# Altium PCB qol56-pcb(1).PcbDoc (part 1 of 2)
Units mm, origin at the board's own origin, x right, y up, seen from the top; angles counter-clockwise.
Board outline 272 x 86 mm, 2 copper layers (F.Cu, B.Cu); 180 components, 134 nets, 1209 pads, 192 vias.
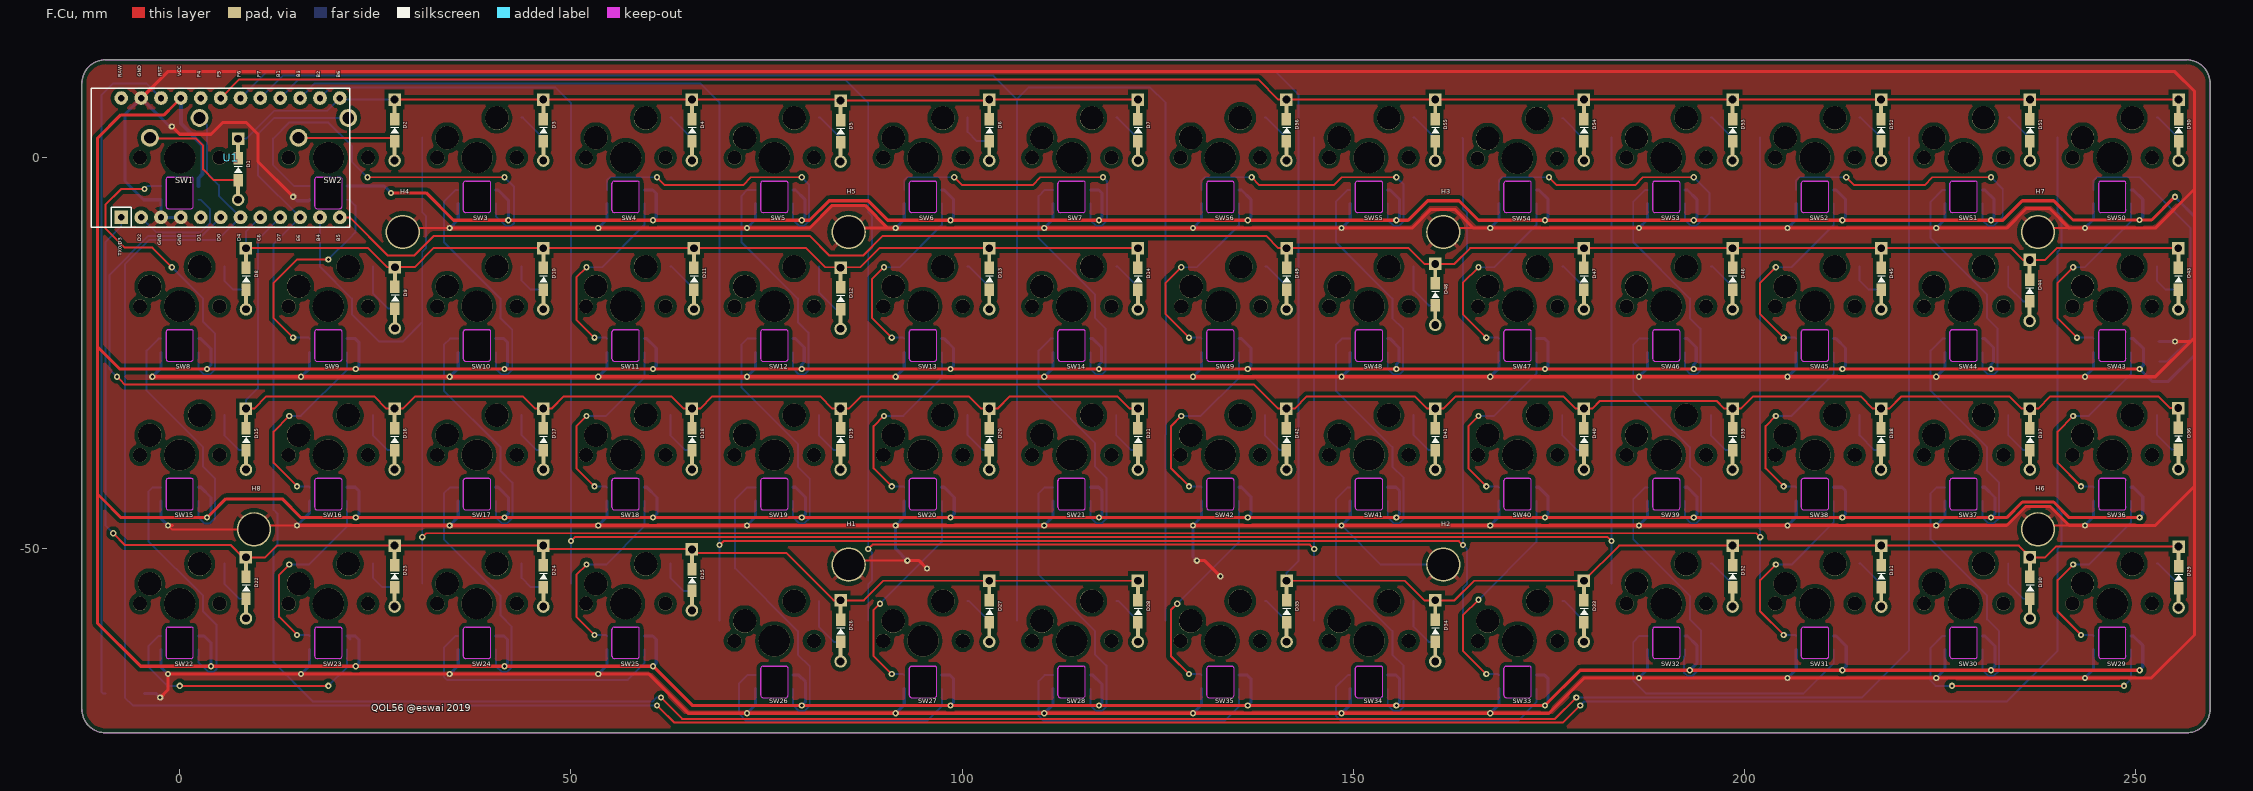
[diagram p0: F.Cu view]
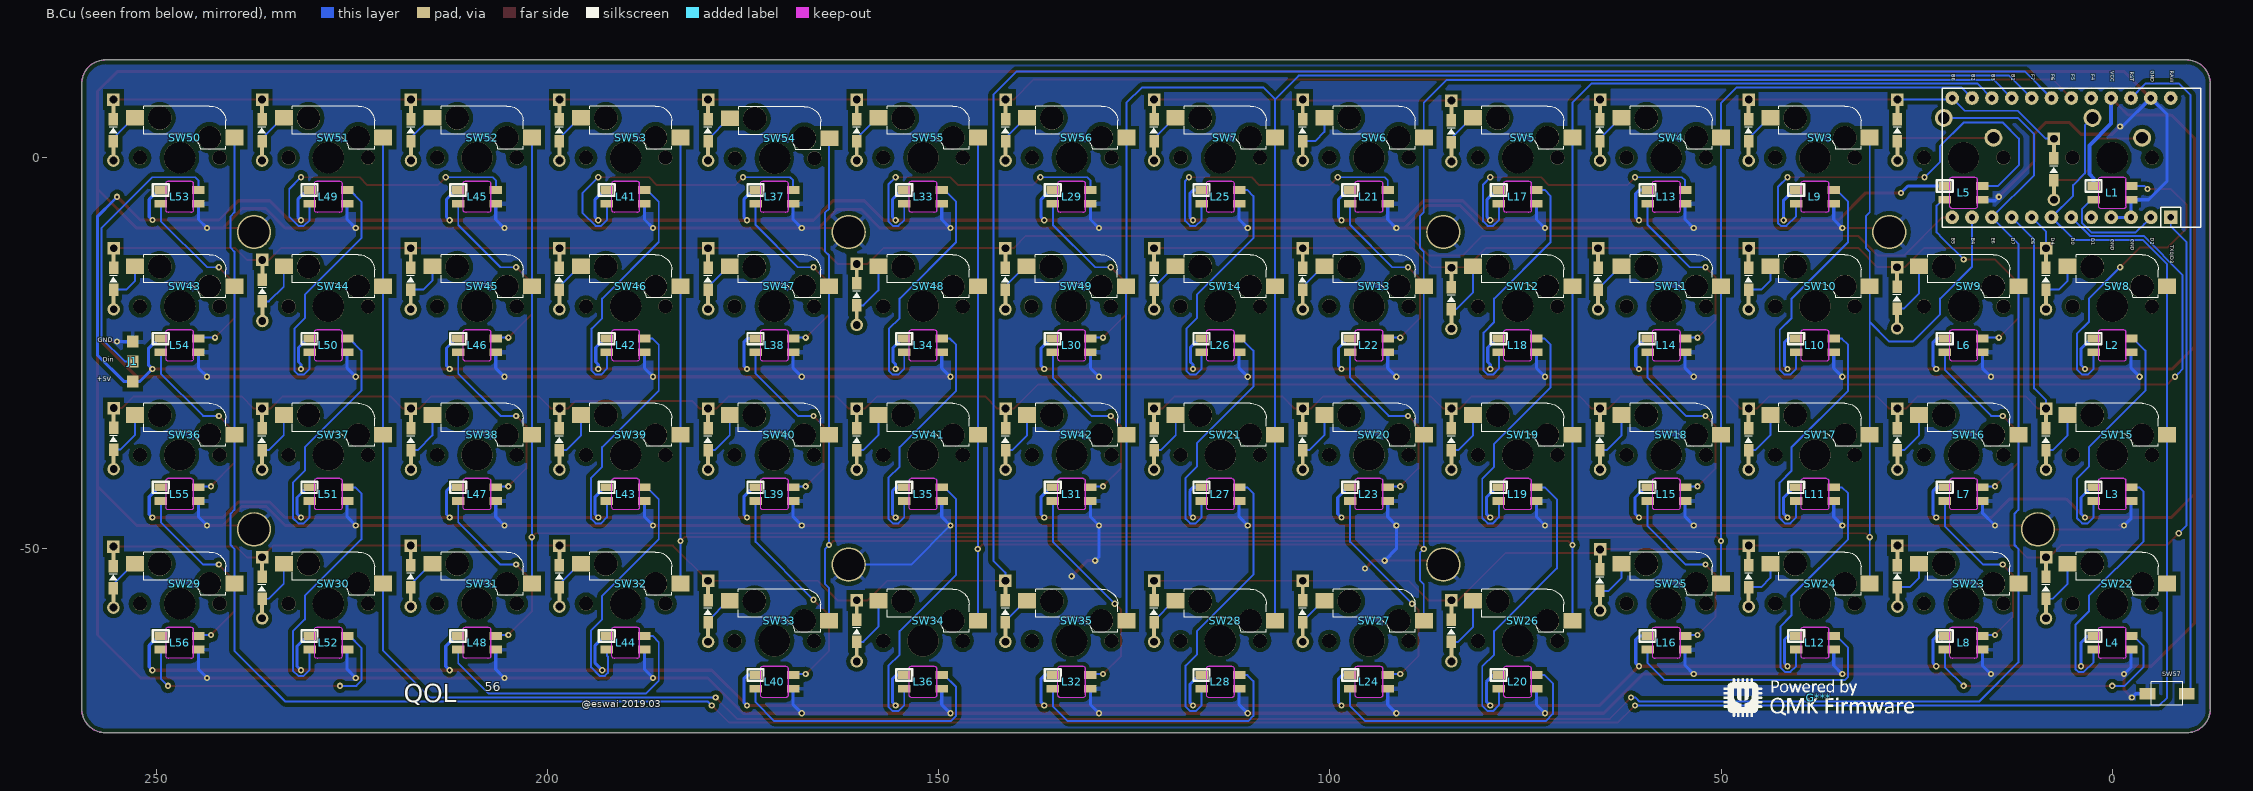
[diagram p1: B.Cu view, seen from below]

## Layer stack, top to bottom
F.Mask: solder mask 0.0102, Solder Resist, Dk 3.5
F.Cu: signal copper 0.0356
Dielectric 1: dielectric 0.32, FR-4, Dk 4.8
B.Cu: signal copper 0.0356
B.Mask: solder mask 0.0102, Solder Resist, Dk 3.5

## Board outline
259.5,-70.5 cw(c256.5,-70.5) 256.5,-73.5 -9.5,-73.5 cw(c-9.5,-70.5) -12.5,-70.5 -12.5,9.5 cw(c-9.5,9.5) -9.5,12.5 256.5,12.5 cw(c256.5,9.5) 259.5,9.5 259.5,-70.5
cut-out: -1.75,-2.75 -1.75,-6.2 -1.756,-6.2 -1.733,-6.317 -1.666,-6.416 -1.567,-6.483 -1.45,-6.506 -1.45,-6.5 1.45,-6.5 1.45,-6.506 1.567,-6.483 1.666,-6.416 1.733,-6.317 1.756,-6.2 1.75,-6.2 1.75,-2.75 1.755,-2.75 1.735,-2.652 1.68,-2.57 1.598,-2.515 1.5,-2.495 1.5,-2.5 -1.45,-2.5 -1.45,-2.494 -1.567,-2.517 -1.666,-2.584 -1.733,-2.683 -1.747,-2.758 -1.75,-2.75
cut-out: 245.25,-60.25 245.25,-63.7 245.244,-63.7 245.267,-63.817 245.334,-63.916 245.433,-63.983 245.55,-64.006 245.55,-64 248.45,-64 248.45,-64.006 248.567,-63.983 248.666,-63.916 248.733,-63.817 248.756,-63.7 248.75,-63.7 248.75,-60.25 248.755,-60.25 248.735,-60.152 248.68,-60.07 248.598,-60.015 248.5,-59.995 248.5,-60 245.55,-60 245.55,-59.994 245.433,-60.017 245.334,-60.084 245.267,-60.183 245.253,-60.258
cut-out: 245.25,-41.25 245.25,-44.7 245.244,-44.7 245.267,-44.817 245.334,-44.916 245.433,-44.983 245.55,-45.006 245.55,-45 248.45,-45 248.45,-45.006 248.567,-44.983 248.666,-44.916 248.733,-44.817 248.756,-44.7 248.75,-44.7 248.75,-41.25 248.755,-41.25 248.735,-41.152 248.68,-41.07 248.598,-41.015 248.5,-40.995 248.5,-41 245.55,-41 245.55,-40.994 245.433,-41.017 245.334,-41.084 245.267,-41.183 245.253,-41.258
cut-out: 245.25,-22.25 245.25,-25.7 245.244,-25.7 245.267,-25.817 245.334,-25.916 245.433,-25.983 245.55,-26.006 245.55,-26 248.45,-26 248.45,-26.006 248.567,-25.983 248.666,-25.916 248.733,-25.817 248.756,-25.7 248.75,-25.7 248.75,-22.25 248.755,-22.25 248.735,-22.152 248.68,-22.07 248.598,-22.015 248.5,-21.995 248.5,-22 245.55,-22 245.55,-21.994 245.433,-22.017 245.334,-22.084 245.267,-22.183 245.253,-22.258
cut-out: 245.25,-3.25 245.25,-6.7 245.244,-6.7 245.267,-6.817 245.334,-6.916 245.433,-6.983 245.55,-7.006 245.55,-7 248.45,-7 248.45,-7.006 248.567,-6.983 248.666,-6.916 248.733,-6.817 248.756,-6.7 248.75,-6.7 248.75,-3.25 248.755,-3.25 248.735,-3.152 248.68,-3.07 248.598,-3.015 248.5,-2.995 248.5,-3 245.55,-3 245.55,-2.994 245.433,-3.017 245.334,-3.084 245.267,-3.183 245.253,-3.258
cut-out: 226.25,-60.25 226.25,-63.7 226.244,-63.7 226.267,-63.817 226.334,-63.916 226.433,-63.983 226.55,-64.006 226.55,-64 229.45,-64 229.45,-64.006 229.567,-63.983 229.666,-63.916 229.733,-63.817 229.756,-63.7 229.75,-63.7 229.75,-60.25 229.755,-60.25 229.735,-60.152 229.68,-60.07 229.598,-60.015 229.5,-59.995 229.5,-60 226.55,-60 226.55,-59.994 226.433,-60.017 226.334,-60.084 226.267,-60.183 226.253,-60.258
cut-out: 226.25,-41.25 226.25,-44.7 226.244,-44.7 226.267,-44.817 226.334,-44.916 226.433,-44.983 226.55,-45.006 226.55,-45 229.45,-45 229.45,-45.006 229.567,-44.983 229.666,-44.916 229.733,-44.817 229.756,-44.7 229.75,-44.7 229.75,-41.25 229.755,-41.25 229.735,-41.152 229.68,-41.07 229.598,-41.015 229.5,-40.995 229.5,-41 226.55,-41 226.55,-40.994 226.433,-41.017 226.334,-41.084 226.267,-41.183 226.253,-41.258
cut-out: 226.25,-22.25 226.25,-25.7 226.244,-25.7 226.267,-25.817 226.334,-25.916 226.433,-25.983 226.55,-26.006 226.55,-26 229.45,-26 229.45,-26.006 229.567,-25.983 229.666,-25.916 229.733,-25.817 229.756,-25.7 229.75,-25.7 229.75,-22.25 229.755,-22.25 229.735,-22.152 229.68,-22.07 229.598,-22.015 229.5,-21.995 229.5,-22 226.55,-22 226.55,-21.994 226.433,-22.017 226.334,-22.084 226.267,-22.183 226.253,-22.258
cut-out: 226.25,-3.25 226.25,-6.7 226.244,-6.7 226.267,-6.817 226.334,-6.916 226.433,-6.983 226.55,-7.006 226.55,-7 229.45,-7 229.45,-7.006 229.567,-6.983 229.666,-6.916 229.733,-6.817 229.756,-6.7 229.75,-6.7 229.75,-3.25 229.755,-3.25 229.735,-3.152 229.68,-3.07 229.598,-3.015 229.5,-2.995 229.5,-3 226.55,-3 226.55,-2.994 226.433,-3.017 226.334,-3.084 226.267,-3.183 226.253,-3.258
cut-out: 207.25,-60.25 207.25,-63.7 207.244,-63.7 207.267,-63.817 207.334,-63.916 207.433,-63.983 207.55,-64.006 207.55,-64 210.45,-64 210.45,-64.006 210.567,-63.983 210.666,-63.916 210.733,-63.817 210.756,-63.7 210.75,-63.7 210.75,-60.25 210.755,-60.25 210.735,-60.152 210.68,-60.07 210.598,-60.015 210.5,-59.995 210.5,-60 207.55,-60 207.55,-59.994 207.433,-60.017 207.334,-60.084 207.267,-60.183 207.253,-60.258
cut-out: 207.25,-41.25 207.25,-44.7 207.244,-44.7 207.267,-44.817 207.334,-44.916 207.433,-44.983 207.55,-45.006 207.55,-45 210.45,-45 210.45,-45.006 210.567,-44.983 210.666,-44.916 210.733,-44.817 210.756,-44.7 210.75,-44.7 210.75,-41.25 210.755,-41.25 210.735,-41.152 210.68,-41.07 210.598,-41.015 210.5,-40.995 210.5,-41 207.55,-41 207.55,-40.994 207.433,-41.017 207.334,-41.084 207.267,-41.183 207.253,-41.258
cut-out: 207.25,-22.25 207.25,-25.7 207.244,-25.7 207.267,-25.817 207.334,-25.916 207.433,-25.983 207.55,-26.006 207.55,-26 210.45,-26 210.45,-26.006 210.567,-25.983 210.666,-25.916 210.733,-25.817 210.756,-25.7 210.75,-25.7 210.75,-22.25 210.755,-22.25 210.735,-22.152 210.68,-22.07 210.598,-22.015 210.5,-21.995 210.5,-22 207.55,-22 207.55,-21.994 207.433,-22.017 207.334,-22.084 207.267,-22.183 207.253,-22.258
cut-out: 207.25,-3.25 207.25,-6.7 207.244,-6.7 207.267,-6.817 207.334,-6.916 207.433,-6.983 207.55,-7.006 207.55,-7 210.45,-7 210.45,-7.006 210.567,-6.983 210.666,-6.916 210.733,-6.817 210.756,-6.7 210.75,-6.7 210.75,-3.25 210.755,-3.25 210.735,-3.152 210.68,-3.07 210.598,-3.015 210.5,-2.995 210.5,-3 207.55,-3 207.55,-2.994 207.433,-3.017 207.334,-3.084 207.267,-3.183 207.253,-3.258
cut-out: 188.25,-60.25 188.25,-63.7 188.244,-63.7 188.267,-63.817 188.334,-63.916 188.433,-63.983 188.55,-64.006 188.55,-64 191.45,-64 191.45,-64.006 191.567,-63.983 191.666,-63.916 191.733,-63.817 191.756,-63.7 191.75,-63.7 191.75,-60.25 191.755,-60.25 191.735,-60.152 191.68,-60.07 191.598,-60.015 191.5,-59.995 191.5,-60 188.55,-60 188.55,-59.994 188.433,-60.017 188.334,-60.084 188.267,-60.183 188.253,-60.258
cut-out: 188.25,-41.25 188.25,-44.7 188.244,-44.7 188.267,-44.817 188.334,-44.916 188.433,-44.983 188.55,-45.006 188.55,-45 191.45,-45 191.45,-45.006 191.567,-44.983 191.666,-44.916 191.733,-44.817 191.756,-44.7 191.75,-44.7 191.75,-41.25 191.755,-41.25 191.735,-41.152 191.68,-41.07 191.598,-41.015 191.5,-40.995 191.5,-41 188.55,-41 188.55,-40.994 188.433,-41.017 188.334,-41.084 188.267,-41.183 188.253,-41.258
cut-out: 188.25,-22.25 188.25,-25.7 188.244,-25.7 188.267,-25.817 188.334,-25.916 188.433,-25.983 188.55,-26.006 188.55,-26 191.45,-26 191.45,-26.006 191.567,-25.983 191.666,-25.916 191.733,-25.817 191.756,-25.7 191.75,-25.7 191.75,-22.25 191.755,-22.25 191.735,-22.152 191.68,-22.07 191.598,-22.015 191.5,-21.995 191.5,-22 188.55,-22 188.55,-21.994 188.433,-22.017 188.334,-22.084 188.267,-22.183 188.253,-22.258
cut-out: 188.25,-3.25 188.25,-6.7 188.244,-6.7 188.267,-6.817 188.334,-6.916 188.433,-6.983 188.55,-7.006 188.55,-7 191.45,-7 191.45,-7.006 191.567,-6.983 191.666,-6.916 191.733,-6.817 191.756,-6.7 191.75,-6.7 191.75,-3.25 191.755,-3.25 191.735,-3.152 191.68,-3.07 191.598,-3.015 191.5,-2.995 191.5,-3 188.55,-3 188.55,-2.994 188.433,-3.017 188.334,-3.084 188.267,-3.183 188.253,-3.258
cut-out: 169.25,-65.25 169.25,-68.7 169.244,-68.7 169.267,-68.817 169.334,-68.916 169.433,-68.983 169.55,-69.006 169.55,-69 172.45,-69 172.45,-69.006 172.567,-68.983 172.666,-68.916 172.733,-68.817 172.756,-68.7 172.75,-68.7 172.75,-65.25 172.755,-65.25 172.735,-65.152 172.68,-65.07 172.598,-65.015 172.5,-64.995 172.5,-65 169.55,-65 169.55,-64.994 169.433,-65.017 169.334,-65.084 169.267,-65.183 169.253,-65.258
cut-out: 169.25,-41.25 169.25,-44.7 169.244,-44.7 169.267,-44.817 169.334,-44.916 169.433,-44.983 169.55,-45.006 169.55,-45 172.45,-45 172.45,-45.006 172.567,-44.983 172.666,-44.916 172.733,-44.817 172.756,-44.7 172.75,-44.7 172.75,-41.25 172.755,-41.25 172.735,-41.152 172.68,-41.07 172.598,-41.015 172.5,-40.995 172.5,-41 169.55,-41 169.55,-40.994 169.433,-41.017 169.334,-41.084 169.267,-41.183 169.253,-41.258
cut-out: 169.25,-22.25 169.25,-25.7 169.244,-25.7 169.267,-25.817 169.334,-25.916 169.433,-25.983 169.55,-26.006 169.55,-26 172.45,-26 172.45,-26.006 172.567,-25.983 172.666,-25.916 172.733,-25.817 172.756,-25.7 172.75,-25.7 172.75,-22.25 172.755,-22.25 172.735,-22.152 172.68,-22.07 172.598,-22.015 172.5,-21.995 172.5,-22 169.55,-22 169.55,-21.994 169.433,-22.017 169.334,-22.084 169.267,-22.183 169.253,-22.258
cut-out: 169.25,-3.25 169.25,-6.7 169.244,-6.7 169.267,-6.817 169.334,-6.916 169.433,-6.983 169.55,-7.006 169.55,-7 172.45,-7 172.45,-7.006 172.567,-6.983 172.666,-6.916 172.733,-6.817 172.756,-6.7 172.75,-6.7 172.75,-3.25 172.755,-3.25 172.735,-3.152 172.68,-3.07 172.598,-3.015 172.5,-2.995 172.5,-3 169.55,-3 169.55,-2.994 169.433,-3.017 169.334,-3.084 169.267,-3.183 169.253,-3.258
cut-out: 150.25,-65.25 150.25,-68.7 150.244,-68.7 150.267,-68.817 150.334,-68.916 150.433,-68.983 150.55,-69.006 150.55,-69 153.45,-69 153.45,-69.006 153.567,-68.983 153.666,-68.916 153.733,-68.817 153.756,-68.7 153.75,-68.7 153.75,-65.25 153.755,-65.25 153.735,-65.152 153.68,-65.07 153.598,-65.015 153.5,-64.995 153.5,-65 150.55,-65 150.55,-64.994 150.433,-65.017 150.334,-65.084 150.267,-65.183 150.253,-65.258
cut-out: 150.25,-41.25 150.25,-44.7 150.244,-44.7 150.267,-44.817 150.334,-44.916 150.433,-44.983 150.55,-45.006 150.55,-45 153.45,-45 153.45,-45.006 153.567,-44.983 153.666,-44.916 153.733,-44.817 153.756,-44.7 153.75,-44.7 153.75,-41.25 153.755,-41.25 153.735,-41.152 153.68,-41.07 153.598,-41.015 153.5,-40.995 153.5,-41 150.55,-41 150.55,-40.994 150.433,-41.017 150.334,-41.084 150.267,-41.183 150.253,-41.258
cut-out: 150.25,-22.25 150.25,-25.7 150.244,-25.7 150.267,-25.817 150.334,-25.916 150.433,-25.983 150.55,-26.006 150.55,-26 153.45,-26 153.45,-26.006 153.567,-25.983 153.666,-25.916 153.733,-25.817 153.756,-25.7 153.75,-25.7 153.75,-22.25 153.755,-22.25 153.735,-22.152 153.68,-22.07 153.598,-22.015 153.5,-21.995 153.5,-22 150.55,-22 150.55,-21.994 150.433,-22.017 150.334,-22.084 150.267,-22.183 150.253,-22.258
cut-out: 150.25,-3.25 150.25,-6.7 150.244,-6.7 150.267,-6.817 150.334,-6.916 150.433,-6.983 150.55,-7.006 150.55,-7 153.45,-7 153.45,-7.006 153.567,-6.983 153.666,-6.916 153.733,-6.817 153.756,-6.7 153.75,-6.7 153.75,-3.25 153.755,-3.25 153.735,-3.152 153.68,-3.07 153.598,-3.015 153.5,-2.995 153.5,-3 150.55,-3 150.55,-2.994 150.433,-3.017 150.334,-3.084 150.267,-3.183 150.253,-3.258
cut-out: 131.25,-65.25 131.25,-68.7 131.244,-68.7 131.267,-68.817 131.334,-68.916 131.433,-68.983 131.55,-69.006 131.55,-69 134.45,-69 134.45,-69.006 134.567,-68.983 134.666,-68.916 134.733,-68.817 134.756,-68.7 134.75,-68.7 134.75,-65.25 134.755,-65.25 134.735,-65.152 134.68,-65.07 134.598,-65.015 134.5,-64.995 134.5,-65 131.55,-65 131.55,-64.994 131.433,-65.017 131.334,-65.084 131.267,-65.183 131.253,-65.258
cut-out: 131.25,-41.25 131.25,-44.7 131.244,-44.7 131.267,-44.817 131.334,-44.916 131.433,-44.983 131.55,-45.006 131.55,-45 134.45,-45 134.45,-45.006 134.567,-44.983 134.666,-44.916 134.733,-44.817 134.756,-44.7 134.75,-44.7 134.75,-41.25 134.755,-41.25 134.735,-41.152 134.68,-41.07 134.598,-41.015 134.5,-40.995 134.5,-41 131.55,-41 131.55,-40.994 131.433,-41.017 131.334,-41.084 131.267,-41.183 131.253,-41.258
cut-out: 131.25,-22.25 131.25,-25.7 131.244,-25.7 131.267,-25.817 131.334,-25.916 131.433,-25.983 131.55,-26.006 131.55,-26 134.45,-26 134.45,-26.006 134.567,-25.983 134.666,-25.916 134.733,-25.817 134.756,-25.7 134.75,-25.7 134.75,-22.25 134.755,-22.25 134.735,-22.152 134.68,-22.07 134.598,-22.015 134.5,-21.995 134.5,-22 131.55,-22 131.55,-21.994 131.433,-22.017 131.334,-22.084 131.267,-22.183 131.253,-22.258
cut-out: 131.25,-3.25 131.25,-6.7 131.244,-6.7 131.267,-6.817 131.334,-6.916 131.433,-6.983 131.55,-7.006 131.55,-7 134.45,-7 134.45,-7.006 134.567,-6.983 134.666,-6.916 134.733,-6.817 134.756,-6.7 134.75,-6.7 134.75,-3.25 134.755,-3.25 134.735,-3.152 134.68,-3.07 134.598,-3.015 134.5,-2.995 134.5,-3 131.55,-3 131.55,-2.994 131.433,-3.017 131.334,-3.084 131.267,-3.183 131.253,-3.258
cut-out: 112.25,-65.25 112.25,-68.7 112.244,-68.7 112.267,-68.817 112.334,-68.916 112.433,-68.983 112.55,-69.006 112.55,-69 115.45,-69 115.45,-69.006 115.567,-68.983 115.666,-68.916 115.733,-68.817 115.756,-68.7 115.75,-68.7 115.75,-65.25 115.755,-65.25 115.735,-65.152 115.68,-65.07 115.598,-65.015 115.5,-64.995 115.5,-65 112.55,-65 112.55,-64.994 112.433,-65.017 112.334,-65.084 112.267,-65.183 112.253,-65.258
cut-out: 112.25,-41.25 112.25,-44.7 112.244,-44.7 112.267,-44.817 112.334,-44.916 112.433,-44.983 112.55,-45.006 112.55,-45 115.45,-45 115.45,-45.006 115.567,-44.983 115.666,-44.916 115.733,-44.817 115.756,-44.7 115.75,-44.7 115.75,-41.25 115.755,-41.25 115.735,-41.152 115.68,-41.07 115.598,-41.015 115.5,-40.995 115.5,-41 112.55,-41 112.55,-40.994 112.433,-41.017 112.334,-41.084 112.267,-41.183 112.253,-41.258
cut-out: 112.25,-22.25 112.25,-25.7 112.244,-25.7 112.267,-25.817 112.334,-25.916 112.433,-25.983 112.55,-26.006 112.55,-26 115.45,-26 115.45,-26.006 115.567,-25.983 115.666,-25.916 115.733,-25.817 115.756,-25.7 115.75,-25.7 115.75,-22.25 115.755,-22.25 115.735,-22.152 115.68,-22.07 115.598,-22.015 115.5,-21.995 115.5,-22 112.55,-22 112.55,-21.994 112.433,-22.017 112.334,-22.084 112.267,-22.183 112.253,-22.258
cut-out: 93.25,-65.25 93.25,-68.7 93.244,-68.7 93.267,-68.817 93.334,-68.916 93.433,-68.983 93.55,-69.006 93.55,-69 96.45,-69 96.45,-69.006 96.567,-68.983 96.666,-68.916 96.733,-68.817 96.756,-68.7 96.75,-68.7 96.75,-65.25 96.755,-65.25 96.735,-65.152 96.68,-65.07 96.598,-65.015 96.5,-64.995 96.5,-65 93.55,-65 93.55,-64.994 93.433,-65.017 93.334,-65.084 93.267,-65.183 93.253,-65.258
cut-out: 93.25,-41.25 93.25,-44.7 93.244,-44.7 93.267,-44.817 93.334,-44.916 93.433,-44.983 93.55,-45.006 93.55,-45 96.45,-45 96.45,-45.006 96.567,-44.983 96.666,-44.916 96.733,-44.817 96.756,-44.7 96.75,-44.7 96.75,-41.25 96.755,-41.25 96.735,-41.152 96.68,-41.07 96.598,-41.015 96.5,-40.995 96.5,-41 93.55,-41 93.55,-40.994 93.433,-41.017 93.334,-41.084 93.267,-41.183 93.253,-41.258
cut-out: 93.25,-22.25 93.25,-25.7 93.244,-25.7 93.267,-25.817 93.334,-25.916 93.433,-25.983 93.55,-26.006 93.55,-26 96.45,-26 96.45,-26.006 96.567,-25.983 96.666,-25.916 96.733,-25.817 96.756,-25.7 96.75,-25.7 96.75,-22.25 96.755,-22.25 96.735,-22.152 96.68,-22.07 96.598,-22.015 96.5,-21.995 96.5,-22 93.55,-22 93.55,-21.994 93.433,-22.017 93.334,-22.084 93.267,-22.183 93.253,-22.258
cut-out: 93.25,-3.25 93.25,-6.7 93.244,-6.7 93.267,-6.817 93.334,-6.916 93.433,-6.983 93.55,-7.006 93.55,-7 96.45,-7 96.45,-7.006 96.567,-6.983 96.666,-6.916 96.733,-6.817 96.756,-6.7 96.75,-6.7 96.75,-3.25 96.755,-3.25 96.735,-3.152 96.68,-3.07 96.598,-3.015 96.5,-2.995 96.5,-3 93.55,-3 93.55,-2.994 93.433,-3.017 93.334,-3.084 93.267,-3.183 93.253,-3.258
cut-out: 74.25,-65.25 74.25,-68.7 74.244,-68.7 74.267,-68.817 74.334,-68.916 74.433,-68.983 74.55,-69.006 74.55,-69 77.45,-69 77.45,-69.006 77.567,-68.983 77.666,-68.916 77.733,-68.817 77.756,-68.7 77.75,-68.7 77.75,-65.25 77.755,-65.25 77.735,-65.152 77.68,-65.07 77.598,-65.015 77.5,-64.995 77.5,-65 74.55,-65 74.55,-64.994 74.433,-65.017 74.334,-65.084 74.267,-65.183 74.253,-65.258
cut-out: 74.25,-41.25 74.25,-44.7 74.244,-44.7 74.267,-44.817 74.334,-44.916 74.433,-44.983 74.55,-45.006 74.55,-45 77.45,-45 77.45,-45.006 77.567,-44.983 77.666,-44.916 77.733,-44.817 77.756,-44.7 77.75,-44.7 77.75,-41.25 77.755,-41.25 77.735,-41.152 77.68,-41.07 77.598,-41.015 77.5,-40.995 77.5,-41 74.55,-41 74.55,-40.994 74.433,-41.017 74.334,-41.084 74.267,-41.183 74.253,-41.258
cut-out: 74.25,-22.25 74.25,-25.7 74.244,-25.7 74.267,-25.817 74.334,-25.916 74.433,-25.983 74.55,-26.006 74.55,-26 77.45,-26 77.45,-26.006 77.567,-25.983 77.666,-25.916 77.733,-25.817 77.756,-25.7 77.75,-25.7 77.75,-22.25 77.755,-22.25 77.735,-22.152 77.68,-22.07 77.598,-22.015 77.5,-21.995 77.5,-22 74.55,-22 74.55,-21.994 74.433,-22.017 74.334,-22.084 74.267,-22.183 74.253,-22.258
cut-out: 74.25,-3.25 74.25,-6.7 74.244,-6.7 74.267,-6.817 74.334,-6.916 74.433,-6.983 74.55,-7.006 74.55,-7 77.45,-7 77.45,-7.006 77.567,-6.983 77.666,-6.916 77.733,-6.817 77.756,-6.7 77.75,-6.7 77.75,-3.25 77.755,-3.25 77.735,-3.152 77.68,-3.07 77.598,-3.015 77.5,-2.995 77.5,-3 74.55,-3 74.55,-2.994 74.433,-3.017 74.334,-3.084 74.267,-3.183 74.253,-3.258
cut-out: 55.25,-60.25 55.25,-63.7 55.244,-63.7 55.267,-63.817 55.334,-63.916 55.433,-63.983 55.55,-64.006 55.55,-64 58.45,-64 58.45,-64.006 58.567,-63.983 58.666,-63.916 58.733,-63.817 58.756,-63.7 58.75,-63.7 58.75,-60.25 58.755,-60.25 58.735,-60.152 58.68,-60.07 58.598,-60.015 58.5,-59.995 58.5,-60 55.55,-60 55.55,-59.994 55.433,-60.017 55.334,-60.084 55.267,-60.183 55.253,-60.258
cut-out: 55.25,-41.25 55.25,-44.7 55.244,-44.7 55.267,-44.817 55.334,-44.916 55.433,-44.983 55.55,-45.006 55.55,-45 58.45,-45 58.45,-45.006 58.567,-44.983 58.666,-44.916 58.733,-44.817 58.756,-44.7 58.75,-44.7 58.75,-41.25 58.755,-41.25 58.735,-41.152 58.68,-41.07 58.598,-41.015 58.5,-40.995 58.5,-41 55.55,-41 55.55,-40.994 55.433,-41.017 55.334,-41.084 55.267,-41.183 55.253,-41.258
cut-out: 55.25,-22.25 55.25,-25.7 55.244,-25.7 55.267,-25.817 55.334,-25.916 55.433,-25.983 55.55,-26.006 55.55,-26 58.45,-26 58.45,-26.006 58.567,-25.983 58.666,-25.916 58.733,-25.817 58.756,-25.7 58.75,-25.7 58.75,-22.25 58.755,-22.25 58.735,-22.152 58.68,-22.07 58.598,-22.015 58.5,-21.995 58.5,-22 55.55,-22 55.55,-21.994 55.433,-22.017 55.334,-22.084 55.267,-22.183 55.253,-22.258
cut-out: 55.25,-3.25 55.25,-6.7 55.244,-6.7 55.267,-6.817 55.334,-6.916 55.433,-6.983 55.55,-7.006 55.55,-7 58.45,-7 58.45,-7.006 58.567,-6.983 58.666,-6.916 58.733,-6.817 58.756,-6.7 58.75,-6.7 58.75,-3.25 58.755,-3.25 58.735,-3.152 58.68,-3.07 58.598,-3.015 58.5,-2.995 58.5,-3 55.55,-3 55.55,-2.994 55.433,-3.017 55.334,-3.084 55.267,-3.183 55.253,-3.258
cut-out: 36.25,-60.25 36.25,-63.7 36.244,-63.7 36.267,-63.817 36.334,-63.916 36.433,-63.983 36.55,-64.006 36.55,-64 39.45,-64 39.45,-64.006 39.567,-63.983 39.666,-63.916 39.733,-63.817 39.756,-63.7 39.75,-63.7 39.75,-60.25 39.755,-60.25 39.735,-60.152 39.68,-60.07 39.598,-60.015 39.5,-59.995 39.5,-60 36.55,-60 36.55,-59.994 36.433,-60.017 36.334,-60.084 36.267,-60.183 36.253,-60.258
cut-out: 36.25,-41.25 36.25,-44.7 36.244,-44.7 36.267,-44.817 36.334,-44.916 36.433,-44.983 36.55,-45.006 36.55,-45 39.45,-45 39.45,-45.006 39.567,-44.983 39.666,-44.916 39.733,-44.817 39.756,-44.7 39.75,-44.7 39.75,-41.25 39.755,-41.25 39.735,-41.152 39.68,-41.07 39.598,-41.015 39.5,-40.995 39.5,-41 36.55,-41 36.55,-40.994 36.433,-41.017 36.334,-41.084 36.267,-41.183 36.253,-41.258
cut-out: 36.25,-22.25 36.25,-25.7 36.244,-25.7 36.267,-25.817 36.334,-25.916 36.433,-25.983 36.55,-26.006 36.55,-26 39.45,-26 39.45,-26.006 39.567,-25.983 39.666,-25.916 39.733,-25.817 39.756,-25.7 39.75,-25.7 39.75,-22.25 39.755,-22.25 39.735,-22.152 39.68,-22.07 39.598,-22.015 39.5,-21.995 39.5,-22 36.55,-22 36.55,-21.994 36.433,-22.017 36.334,-22.084 36.267,-22.183 36.253,-22.258
cut-out: 36.25,-3.25 36.25,-6.7 36.244,-6.7 36.267,-6.817 36.334,-6.916 36.433,-6.983 36.55,-7.006 36.55,-7 39.45,-7 39.45,-7.006 39.567,-6.983 39.666,-6.916 39.733,-6.817 39.756,-6.7 39.75,-6.7 39.75,-3.25 39.755,-3.25 39.735,-3.152 39.68,-3.07 39.598,-3.015 39.5,-2.995 39.5,-3 36.55,-3 36.55,-2.994 36.433,-3.017 36.334,-3.084 36.267,-3.183 36.253,-3.258
cut-out: 17.25,-60.25 17.25,-63.7 17.244,-63.7 17.267,-63.817 17.334,-63.916 17.433,-63.983 17.55,-64.006 17.55,-64 20.45,-64 20.45,-64.006 20.567,-63.983 20.666,-63.916 20.733,-63.817 20.756,-63.7 20.75,-63.7 20.75,-60.25 20.755,-60.25 20.735,-60.152 20.68,-60.07 20.598,-60.015 20.5,-59.995 20.5,-60 17.55,-60 17.55,-59.994 17.433,-60.017 17.334,-60.084 17.267,-60.183 17.253,-60.258
cut-out: 17.25,-41.25 17.25,-44.7 17.244,-44.7 17.267,-44.817 17.334,-44.916 17.433,-44.983 17.55,-45.006 17.55,-45 20.45,-45 20.45,-45.006 20.567,-44.983 20.666,-44.916 20.733,-44.817 20.756,-44.7 20.75,-44.7 20.75,-41.25 20.755,-41.25 20.735,-41.152 20.68,-41.07 20.598,-41.015 20.5,-40.995 20.5,-41 17.55,-41 17.55,-40.994 17.433,-41.017 17.334,-41.084 17.267,-41.183 17.253,-41.258
cut-out: 17.25,-22.25 17.25,-25.7 17.244,-25.7 17.267,-25.817 17.334,-25.916 17.433,-25.983 17.55,-26.006 17.55,-26 20.45,-26 20.45,-26.006 20.567,-25.983 20.666,-25.916 20.733,-25.817 20.756,-25.7 20.75,-25.7 20.75,-22.25 20.755,-22.25 20.735,-22.152 20.68,-22.07 20.598,-22.015 20.5,-21.995 20.5,-22 17.55,-22 17.55,-21.994 17.433,-22.017 17.334,-22.084 17.267,-22.183 17.253,-22.258
cut-out: 17.25,-2.75 17.25,-6.2 17.244,-6.2 17.267,-6.317 17.334,-6.416 17.433,-6.483 17.55,-6.506 17.55,-6.5 20.45,-6.5 20.45,-6.506 20.567,-6.483 20.666,-6.416 20.733,-6.317 20.756,-6.2 20.75,-6.2 20.75,-2.75 20.755,-2.75 20.735,-2.652 20.68,-2.57 20.598,-2.515 20.5,-2.495 20.5,-2.5 17.55,-2.5 17.55,-2.494 17.433,-2.517 17.334,-2.584 17.267,-2.683 17.253,-2.758
cut-out: -1.75,-60.25 -1.75,-63.7 -1.756,-63.7 -1.733,-63.817 -1.666,-63.916 -1.567,-63.983 -1.45,-64.006 -1.45,-64 1.45,-64 1.45,-64.006 1.567,-63.983 1.666,-63.916 1.733,-63.817 1.756,-63.7 1.75,-63.7 1.75,-60.25 1.755,-60.25 1.735,-60.152 1.68,-60.07 1.598,-60.015 1.5,-59.995 1.5,-60 -1.45,-60 -1.45,-59.994 -1.567,-60.017 -1.666,-60.084 -1.733,-60.183 -1.747,-60.258
cut-out: -1.75,-41.25 -1.75,-44.7 -1.756,-44.7 -1.733,-44.817 -1.666,-44.916 -1.567,-44.983 -1.45,-45.006 -1.45,-45 1.45,-45 1.45,-45.006 1.567,-44.983 1.666,-44.916 1.733,-44.817 1.756,-44.7 1.75,-44.7 1.75,-41.25 1.755,-41.25 1.735,-41.152 1.68,-41.07 1.598,-41.015 1.5,-40.995 1.5,-41 -1.45,-41 -1.45,-40.994 -1.567,-41.017 -1.666,-41.084 -1.733,-41.183 -1.747,-41.258
cut-out: -1.75,-22.25 -1.75,-25.7 -1.756,-25.7 -1.733,-25.817 -1.666,-25.916 -1.567,-25.983 -1.45,-26.006 -1.45,-26 1.45,-26 1.45,-26.006 1.567,-25.983 1.666,-25.916 1.733,-25.817 1.756,-25.7 1.75,-25.7 1.75,-22.25 1.755,-22.25 1.735,-22.152 1.68,-22.07 1.598,-22.015 1.5,-21.995 1.5,-22 -1.45,-22 -1.45,-21.994 -1.567,-22.017 -1.666,-22.084 -1.733,-22.183 -1.747,-22.258
cut-out: 112.25,-3.25 112.25,-6.7 112.244,-6.7 112.267,-6.817 112.334,-6.916 112.433,-6.983 112.55,-7.006 112.55,-7 115.45,-7 115.45,-7.006 115.567,-6.983 115.666,-6.916 115.733,-6.817 115.756,-6.7 115.75,-6.7 115.75,-3.25 115.755,-3.25 115.735,-3.152 115.68,-3.07 115.598,-3.015 115.5,-2.995 115.5,-3 112.55,-3 112.55,-2.994 112.433,-3.017 112.334,-3.084 112.267,-3.183 112.253,-3.258 112.25,-3.25

## Design rules (kind name [scope] priority, off if disabled: settings)
Clearance "Clearence 0.508_Polygon" [InNamedPolygon('F.Cu-GND') OR InNamedPolygon('B.Cu-GND')] p1: gap=0.508 ignorepadtopadclearanceinfootprint=FALSE
Clearance "Clearence 0.2_NetClass" [InNetClass('Default') OR InNetClass('VCC')] p2: gap=0.2 ignorepadtopadclearanceinfootprint=FALSE
HoleSize "Hole Size (Default)" [All] p1: absolutevalues=TRUE maxlimit=10 minlimit=0.3 maxpercent=80.000 minpercent=20.000
MinimumSolderMaskSliver [All] p1: minsoldermaskwidth=0
PolygonConnect Polygon_B.Cu-GND_ConnectDirect [IsNamedPolygon('B.Cu-GND') vs IsVia] p1: connectstyle=Direct reliefconductorwidth=0.254 reliefentries=4 polygonreliefangle="90 Angle" airgapwidth=0.254
PolygonConnect Polygon_B.Cu-GND_ConnectRelief45 [IsNamedPolygon('B.Cu-GND') vs (IsThruPin or IsSMTPin) and (PadShape_AllLayers = 'Round')] p2: connectstyle=Relief reliefconductorwidth=0.508 reliefentries=4 polygonreliefangle="45 Angle" airgapwidth=0.508
PolygonConnect Polygon_B.Cu-GND_ConnectRelief90 [IsNamedPolygon('B.Cu-GND') vs (IsThruPin or IsSMTPin) and (PadShape_AllLayers <> 'Round')] p3: connectstyle=Relief reliefconductorwidth=0.508 reliefentries=4 polygonreliefangle="90 Angle" airgapwidth=0.508
PolygonConnect Polygon_F.Cu-GND_ConnectDirect [IsNamedPolygon('F.Cu-GND') vs IsVia] p4: connectstyle=Direct reliefconductorwidth=0.254 reliefentries=4 polygonreliefangle="90 Angle" airgapwidth=0.254
PolygonConnect Polygon_F.Cu-GND_ConnectRelief45 [IsNamedPolygon('F.Cu-GND') vs (IsThruPin or IsSMTPin) and (PadShape_AllLayers = 'Round')] p5: connectstyle=Relief reliefconductorwidth=0.508 reliefentries=4 polygonreliefangle="45 Angle" airgapwidth=0.508
PolygonConnect Polygon_F.Cu-GND_ConnectRelief90 [IsNamedPolygon('F.Cu-GND') vs (IsThruPin or IsSMTPin) and (PadShape_AllLayers <> 'Round')] p6: connectstyle=Relief reliefconductorwidth=0.508 reliefentries=4 polygonreliefangle="90 Angle" airgapwidth=0.508
RoutingVias [All] p1: holewidth=0.711 width=1.27 viastyle="Through Hole" minholewidth=0.711 minwidth=1.27 maxholewidth=0.711 maxwidth=1.27
SilkToSilkClearance [All] p1: silktosilkclearance=0
SilkToSolderMaskClearance [IsPad] p1: minsilkscreentomaskgap=0 clearancetoexposedcopper=TRUE
SolderMaskExpansion [All] p1: expansion=0.102 istentingtop=FALSE
Width [All] p1: maxlimit=10 minlimit=0.2 preferedwidth=0.25 minimp=50.000000 maximp=50.000000 favimp=50.000000
26 further rules are at their usual default settings.

## Classes and differential pairs
net class Default: col0 col1 col2 col3 col4 col5 col6 GND LED Net-(D1-Pad2) Net-(D2-Pad2) Net-(D3-Pad2) Net-(D4-Pad2) Net-(D5-Pad2) Net-(D6-Pad2) Net-(D7-Pad2) Net-(D8-Pad2) Net-(D9-Pad2) Net-(D10-Pad2) Net-(D11-Pad2) Net-(D12-Pad2) Net-(D13-Pad2) Net-(D14-Pad2) Net-(D15-Pad2) Net-(D16-Pad2) Net-(D17-Pad2) Net-(D18-Pad2) Net-(D19-Pad2) Net-(D20-Pad2) Net-(D21-Pad2) Net-(D22-Pad2) Net-(D23-Pad2) Net-(D24-Pad2) Net-(D25-Pad2) Net-(D26-Pad2) Net-(D27-Pad2) Net-(D28-Pad2) Net-(D29-Pad2) Net-(D30-Pad2) Net-(D31-Pad2) Net-(D32-Pad2) Net-(D33-Pad2) Net-(D34-Pad2) Net-(D35-Pad2) Net-(D36-Pad2) Net-(D37-Pad2) Net-(D38-Pad2) Net-(D39-Pad2) Net-(D40-Pad2) Net-(D41-Pad2) Net-(D42-Pad2) Net-(D43-Pad2) Net-(D44-Pad2) Net-(D45-Pad2) Net-(D46-Pad2) Net-(D47-Pad2) Net-(D48-Pad2) Net-(D49-Pad2) Net-(D50-Pad2) Net-(D51-Pad2) Net-(D52-Pad2) Net-(D53-Pad2) Net-(D54-Pad2) Net-(D55-Pad2) Net-(D56-Pad2) Net-(J1-Pad2) Net-(L1-Pad1) Net-(L2-Pad1) Net-(L3-Pad1) Net-(L4-Pad1) Net-(L5-Pad1) Net-(L5-Pad3) Net-(L6-Pad3) Net-(L7-Pad3) Net-(L10-Pad1) Net-(L10-Pad3) Net-(L11-Pad1) Net-(L12-Pad1) Net-(L13-Pad1) Net-(L13-Pad3) Net-(L14-Pad3) Net-(L15-Pad3) Net-(L17-Pad1) Net-(L18-Pad1) Net-(L19-Pad1) Net-(L20-Pad1) Net-(L21-Pad1) Net-(L21-Pad3) Net-(L22-Pad3) Net-(L23-Pad3) Net-(L25-Pad1) Net-(L26-Pad1) Net-(L27-Pad1) Net-(L28-Pad1) Net-(L29-Pad1) Net-(L29-Pad3) Net-(L30-Pad3) Net-(L31-Pad3) Net-(L33-Pad1) Net-(L34-Pad1) Net-(L35-Pad1) Net-(L36-Pad1) Net-(L37-Pad1) Net-(L37-Pad3) Net-(L38-Pad3) Net-(L39-Pad3) Net-(L41-Pad1) Net-(L42-Pad1) Net-(L43-Pad1) Net-(L44-Pad1) Net-(L45-Pad1) Net-(L45-Pad3) Net-(L46-Pad3) Net-(L47-Pad3) Net-(L49-Pad1) Net-(L50-Pad1) Net-(L51-Pad1) Net-(L52-Pad1) Net-(L53-Pad3) Net-(L54-Pad3) Net-(L55-Pad3) Net-(U1-Pad5) Net-(U1-Pad20) Net-(U1-Pad24) reset row0 row1 row2 row3 row4 row5 row6 row7 VCC

## Components (designator, comment, footprint, x,y, rotation, side; value= is the part's Value field where it differs from the comment)
D1 "D" Diode-dual 7.5,-1.5 r270 top
D2 "D" Diode-dual 27.5,3.5 r270 top
D3 "D" Diode-dual 46.5,3.5 r270 top
D4 "D" Diode-dual 65.5,3.5 r270 top
D5 "D" Diode-dual 84.5,3.37 r270 top
D6 "D" Diode-dual 103.5,3.5 r270 top
D7 "D" Diode-dual 122.5,3.5 r270 top
D8 "D" Diode-dual 8.5,-15.5 r270 top
D9 "D" Diode-dual 27.53,-17.93 r270 top
D10 "D" Diode-dual 46.5,-15.5 r270 top
D11 "D" Diode-dual 65.75,-15.5 r270 top
D12 "D" Diode-dual 84.5,-18 r270 top
D13 "D" Diode-dual 103.5,-15.5 r270 top
D14 "D" Diode-dual 122.5,-15.5 r270 top
D15 "D" Diode-dual 8.5,-36 r270 top
D16 "D" Diode-dual 27.5,-36 r270 top
D17 "D" Diode-dual 46.5,-36 r270 top
D18 "D" Diode-dual 65.5,-36 r270 top
D19 "D" Diode-dual 84.5,-36 r270 top
D20 "D" Diode-dual 103.5,-36 r270 top
D21 "D" Diode-dual 122.5,-36 r270 top
D22 "D" Diode-dual 8.5,-55 r270 top
D23 "D" Diode-dual 27.5,-53.5 r270 top
D24 "D" Diode-dual 46.5,-53.5 r270 top
D25 "D" Diode-dual 65.5,-54 r270 top
D26 "D" Diode-dual 84.5,-60.5 r270 top
D27 "D" Diode-dual 103.5,-58 r270 top
D28 "D" Diode-dual 122.5,-58 r270 top
D29 "D" Diode-dual 255.5,-53.63 r270 top
D30 "D" Diode-dual 236.5,-55 r270 top
D31 "D" Diode-dual 217.5,-53.5 r270 top
D32 "D" Diode-dual 198.5,-53.5 r270 top
D33 "D" Diode-dual 179.5,-58 r270 top
D34 "D" Diode-dual 160.5,-60.5 r270 top
D35 "D" Diode-dual 141.5,-58 r270 top
D36 "D" Diode-dual 255.47,-35.93 r270 top
D37 "D" Diode-dual 236.5,-36 r270 top
D38 "D" Diode-dual 217.47,-36 r270 top
D39 "D" Diode-dual 198.5,-36 r270 top
D40 "D" Diode-dual 179.5,-36 r270 top
D41 "D" Diode-dual 160.5,-36 r270 top
D42 "D" Diode-dual 141.47,-36 r270 top
D43 "D" Diode-dual 255.47,-15.5 r270 top
D44 "D" Diode-dual 236.47,-17 r270 top
D45 "D" Diode-dual 217.5,-15.5 r270 top
D46 "D" Diode-dual 198.5,-15.5 r270 top
D47 "D" Diode-dual 179.5,-15.5 r270 top
D48 "D" Diode-dual 160.5,-17.5 r270 top
D49 "D" Diode-dual 141.5,-15.5 r270 top
D50 "D" Diode-dual 255.5,3.5 r270 top
D51 "D" Diode-dual 236.5,3.5 r270 top
D52 "D" Diode-dual 217.47,3.5 r270 top
D53 "D" Diode-dual 198.5,3.5 r270 top
D54 "D" Diode-dual 179.5,3.5 r270 top
D55 "D" Diode-dual 160.5,3.5 r270 top
D56 "D" Diode-dual 141.47,3.5 r270 top
G*** "LOGO" qmk 37.5,-69 r0 bottom
H1 "MountingHole_Pad" MountingHole_4mm_Pad 85.5,-52 r0 top
H2 "MountingHole_Pad" MountingHole_4mm_Pad 161.5,-52 r0 top
H3 "MountingHole_Pad" MountingHole_4mm_Pad 161.5,-9.5 r0 top
H4 "MountingHole_Pad" MountingHole_4mm_Pad 28.5,-9.5 r0 top
H5 "MountingHole_Pad" MountingHole_4mm_Pad 85.5,-9.5 r0 top
H6 "MountingHole_Pad" MountingHole_4mm_Pad 237.5,-47.5 r0 top
H7 "MountingHole_Pad" MountingHole_4mm_Pad 237.5,-9.5 r0 top
H8 "MountingHole_Pad" MountingHole_4mm_Pad 9.5,-47.5 r0 top
J1 "Conn_01x03" StripLED_rev 253,-23.5 r0 top
L1 "SK6812MINI" SK6812MINI_rev 0,-4.5 r0 top
L2 "SK6812MINI" SK6812MINI_rev 0,-24 r0 top
L3 "SK6812MINI" SK6812MINI_rev 0,-43 r0 top
L4 "SK6812MINI" SK6812MINI_rev 0,-62 r0 top
L5 "SK6812MINI" SK6812MINI_rev 19,-4.5 r0 top
L6 "SK6812MINI" SK6812MINI_rev 19,-24 r0 top
L7 "SK6812MINI" SK6812MINI_rev 19,-43 r0 top
L8 "SK6812MINI" SK6812MINI_rev 19,-62 r0 top
L9 "SK6812MINI" SK6812MINI_rev 38,-5 r0 top
L10 "SK6812MINI" SK6812MINI_rev 38,-24 r0 top
L11 "SK6812MINI" SK6812MINI_rev 38,-43 r0 top
L12 "SK6812MINI" SK6812MINI_rev 38,-62 r0 top
L13 "SK6812MINI" SK6812MINI_rev 57,-5 r0 top
L14 "SK6812MINI" SK6812MINI_rev 57,-24 r0 top
L15 "SK6812MINI" SK6812MINI_rev 57,-43 r0 top
L16 "SK6812MINI" SK6812MINI_rev 57,-62 r0 top
L17 "SK6812MINI" SK6812MINI_rev 76,-5 r0 top
L18 "SK6812MINI" SK6812MINI_rev 76,-24 r0 top
L19 "SK6812MINI" SK6812MINI_rev 76,-43 r0 top
L20 "SK6812MINI" SK6812MINI_rev 76,-67 r0 top
L21 "SK6812MINI" SK6812MINI_rev 95,-5 r0 top
L22 "SK6812MINI" SK6812MINI_rev 95,-24 r0 top
L23 "SK6812MINI" SK6812MINI_rev 95,-43 r0 top
L24 "SK6812MINI" SK6812MINI_rev 95,-67 r0 top
L25 "SK6812MINI" SK6812MINI_rev 114,-5 r0 top
L26 "SK6812MINI" SK6812MINI_rev 114,-24 r0 top
L27 "SK6812MINI" SK6812MINI_rev 114,-43 r0 top
L28 "SK6812MINI" SK6812MINI_rev 114,-67 r0 top
L29 "SK6812MINI" SK6812MINI_rev 133,-5 r0 top
L30 "SK6812MINI" SK6812MINI_rev 133,-24 r0 top
L31 "SK6812MINI" SK6812MINI_rev 133,-43 r0 top
L32 "SK6812MINI" SK6812MINI_rev 133,-67 r0 top
L33 "SK6812MINI" SK6812MINI_rev 152,-5 r0 top
L34 "SK6812MINI" SK6812MINI_rev 152,-24 r0 top
L35 "SK6812MINI" SK6812MINI_rev 152,-43 r0 top
L36 "SK6812MINI" SK6812MINI_rev 152,-67 r0 top
L37 "SK6812MINI" SK6812MINI_rev 171,-5 r0 top
L38 "SK6812MINI" SK6812MINI_rev 171,-24 r0 top
L39 "SK6812MINI" SK6812MINI_rev 171,-43 r0 top
L40 "SK6812MINI" SK6812MINI_rev 171,-67 r0 top
L41 "SK6812MINI" SK6812MINI_rev 190,-5 r0 top
L42 "SK6812MINI" SK6812MINI_rev 190,-24 r0 top
L43 "SK6812MINI" SK6812MINI_rev 190,-43 r0 top
L44 "SK6812MINI" SK6812MINI_rev 190,-62 r0 top
L45 "SK6812MINI" SK6812MINI_rev 209,-5 r0 top
L46 "SK6812MINI" SK6812MINI_rev 209,-24 r0 top
L47 "SK6812MINI" SK6812MINI_rev 209,-43 r0 top
L48 "SK6812MINI" SK6812MINI_rev 209,-62 r0 top
L49 "SK6812MINI" SK6812MINI_rev 228,-5 r0 top
L50 "SK6812MINI" SK6812MINI_rev 228,-24 r0 top
L51 "SK6812MINI" SK6812MINI_rev 228,-43 r0 top
L52 "SK6812MINI" SK6812MINI_rev 228,-62 r0 top
L53 "SK6812MINI" SK6812MINI_rev 247,-5 r0 top
L54 "SK6812MINI" SK6812MINI_rev 247,-24 r0 top
L55 "SK6812MINI" SK6812MINI_rev 247,-43 r0 top
L56 "SK6812MINI" SK6812MINI_rev 247,-62 r0 top
SW1 "SW_PUSH" MX_PCB_100H 0,0 r0 top
SW2 "SW_PUSH" MX_PCB_100H 19,0 r0 top
SW3 "SW_PUSH" CherryMX_Hotswap 38,0 r0 top
SW4 "SW_PUSH" CherryMX_Hotswap 57,0 r0 top
SW5 "SW_PUSH" CherryMX_Hotswap 76,0 r0 top
SW6 "SW_PUSH" CherryMX_Hotswap 95,0 r0 top
SW7 "SW_PUSH" CherryMX_Hotswap 114,0 r0 top
SW8 "SW_PUSH" CherryMX_Hotswap 0,-19 r0 top
SW9 "SW_PUSH" CherryMX_Hotswap 19,-19 r0 top
SW10 "SW_PUSH" CherryMX_Hotswap 38,-19 r0 top
SW11 "SW_PUSH" CherryMX_Hotswap 57,-19 r0 top
SW12 "SW_PUSH" CherryMX_Hotswap 76,-19 r0 top
SW13 "SW_PUSH" CherryMX_Hotswap 95,-19 r0 top
SW14 "SW_PUSH" CherryMX_Hotswap 114,-19 r0 top
SW15 "SW_PUSH" CherryMX_Hotswap 0,-38 r0 top
SW16 "SW_PUSH" CherryMX_Hotswap 19,-38 r0 top
SW17 "SW_PUSH" CherryMX_Hotswap 38,-38 r0 top
SW18 "SW_PUSH" CherryMX_Hotswap 57,-38 r0 top
SW19 "SW_PUSH" CherryMX_Hotswap 76,-38 r0 top
SW20 "SW_PUSH" CherryMX_Hotswap 95,-38 r0 top
SW21 "SW_PUSH" CherryMX_Hotswap 114,-38 r0 top
SW22 "SW_PUSH" CherryMX_Hotswap 0,-57 r0 top
SW23 "SW_PUSH" CherryMX_Hotswap 19,-57 r0 top
SW24 "SW_PUSH" CherryMX_Hotswap 38,-57 r0 top
SW25 "SW_PUSH" CherryMX_Hotswap 57,-57 r0 top
SW26 "SW_PUSH" CherryMX_Hotswap 76,-61.75 r0 top
SW27 "SW_PUSH" CherryMX_Hotswap 95,-61.75 r0 top
SW28 "SW_PUSH" CherryMX_Hotswap 114,-61.75 r0 top
SW29 "SW_PUSH" CherryMX_Hotswap 247,-57 r0 top
SW30 "SW_PUSH" CherryMX_Hotswap 228,-57 r0 top
SW31 "SW_PUSH" CherryMX_Hotswap 209,-57 r0 top
SW32 "SW_PUSH" CherryMX_Hotswap 190,-57 r0 top
SW33 "SW_PUSH" CherryMX_Hotswap 171,-61.75 r0 top
SW34 "SW_PUSH" CherryMX_Hotswap 152,-61.75 r0 top
SW35 "SW_PUSH" CherryMX_Hotswap 133,-61.75 r0 top
SW36 "SW_PUSH" CherryMX_Hotswap 247,-38 r0 top
SW37 "SW_PUSH" CherryMX_Hotswap 228,-38 r0 top
SW38 "SW_PUSH" CherryMX_Hotswap 209,-38 r0 top
SW39 "SW_PUSH" CherryMX_Hotswap 190,-38 r0 top
SW40 "SW_PUSH" CherryMX_Hotswap 171,-38 r0 top
SW41 "SW_PUSH" CherryMX_Hotswap 152,-38 r0 top
SW42 "SW_PUSH" CherryMX_Hotswap 133,-38 r0 top
SW43 "SW_PUSH" CherryMX_Hotswap 247,-19 r0 top
SW44 "SW_PUSH" CherryMX_Hotswap 228,-19 r0 top
SW45 "SW_PUSH" CherryMX_Hotswap 209,-19 r0 top
SW46 "SW_PUSH" CherryMX_Hotswap 190,-19 r0 top
SW47 "SW_PUSH" CherryMX_Hotswap 171,-19 r0 top
SW48 "SW_PUSH" CherryMX_Hotswap 152,-19 r0 top
SW49 "SW_PUSH" CherryMX_Hotswap 133.08,-19 r0 top
SW50 "SW_PUSH" CherryMX_Hotswap 247,0 r0 top
SW51 "SW_PUSH" CherryMX_Hotswap 228,0 r0 top
SW52 "SW_PUSH" CherryMX_Hotswap 209,0 r0 top
SW53 "SW_PUSH" CherryMX_Hotswap 190,0 r0 top
SW54 "SW_PUSH" CherryMX_Hotswap 170.96,-0.08 r0 top
SW55 "SW_PUSH" CherryMX_Hotswap 152,0 r0 top
SW56 "SW_PUSH" CherryMX_Hotswap 133,0 r0 top
SW57 "SW_PUSH" "SMD 2Pin 3X4MM Tactile Tact Push Button" -7,-68.5 r180 bottom
U1 "ProMicro" ArduinoProMicro 6.5,0 r0 top

## Footprints (in the part's own frame and the unit in brackets; to place one, negate y for a bottom-side part, rotate by r counter-clockwise, add the part's x,y. Pads: shape width x height; smd on the part's side, far side on the other; paste and mask are expansions set on the pad)
ArduinoProMicro [mil]
  rect 69x69 hole 32 paste-69 mask+2.01: 1(-550,-300)
  round 69 hole 32 paste-69 mask+2.01: 2(-450,-300) 3(-350,-300) 4(-250,-300) 5(-150,-300) 6(-50,-300) 7(50,-300) 8(150,-300) 9(250,-300) 10(350,-300) 11(450,-300) 12(550,-300) 13(550,300) 14(450,300) 15(350,300) 16(250,300) 17(150,300) 18(50,300) 19(-50,300) 20(-150,300) 21(-250,300) 22(-350,300) 23(-450,300) 24(-550,300)
  silkscreen extent -700,-350 600,350
CherryMX_Hotswap [mm]
  rect 2.3x2 smd far side mask+0.051: 1(-7,2.58) 2(5.7,5.12)
  round 1.8 hole 1.8 paste-1.8 mask+0.051: Un1(-5.08,0) Un2(5.08,0)
  round 4 hole 4 paste-4 mask+0.051: Un3(0,0)
  round 3 hole 3 paste-3 mask+0.051: Un4(2.54,5.08) Un5(-3.81,2.54)
Diode-dual [mm]
  rect 1.6x1.6 hole 1 paste-1.6 mask+0.051: 1(-3.93,-0.03)
  rect 2.9x0.5 smd far side paste-2.9 mask-2.9: 1(-2.53,-0.03) 2(2.47,-0.03)
  rect 2.9x0.5 smd paste-2.9 mask-2.9: 1(-2.53,-0.03) 2(2.47,-0.03)
  rect 1.6x1.2 smd far side mask+0.051: 1(-1.43,-0.03) 2(1.37,-0.03)
  rect 1.6x1.2 smd mask+0.051: 1(-1.43,-0.03) 2(1.37,-0.03)
  round 1.6 hole 1 paste-1.6 mask+0.051: 2(3.87,-0.03)
  silkscreen extent -0.4,-0.5 0.4,0.5
MountingHole_4mm_Pad [mm]
  round 4.4 hole 4 paste-4.4 mask+0.051: 1(0,0)
MX_PCB_100H [mil]
  round 90 hole 59 paste-90 mask+2.01: 1(100,200) 2(-150,100)
  round 70.87 hole 70.87 paste-70.87 mask+2.01: Un1(200,0) Un2(-200,0)
  round 157 hole 157 paste-157 mask+2.01: Un3(0,0)
qmk [mm]
  silkscreen extent -12.14,-2.44 12.17,2.46
SK6812MINI_rev [mm]
  rect 1.6x1 smd far side mask+0.051: 1(-2.4,0.875) 2(-2.4,-0.875) 3(2.4,-0.875) 4(2.4,0.875)
"SMD 2Pin 3X4MM Tactile Tact Push Button" [mm]
  rect 2x1.5 smd mask+0.051: 1(2.5,0) 2(-2.5,0)
  silkscreen extent -2,-1.5 2,1.5
StripLED_rev [mil]
  rect 60x60 smd far side mask+2.01: 1(0,-200) 2(0,-100) 3(0,0)

## Part data
D1 D2 D3 D4 D5 D6 D7 D8 D9 D10 D11 D12 D13 D14 D15 D16 D17 D18 D19 D20 D21 D22 D23 D24 D25 D26 D27 D28 D29 D30 D31 D32 D33 D34 D35 D36 D37 D38 D39 D40 D41 D42 D43 D44 D45 D46 D47 D48 D49 D50 D51 D52 D53 D54 D55 D56: library part Diode-dual
G***: library part qmk
H1 H2 H3 H4 H5 H6 H7 H8: library part MountingHole_4mm_Pad, "Mounting Hole 4mm"
J1: library part StripLED_rev
L1 L2 L3 L4 L5 L6 L7 L8 L9 L10 L11 L12 L13 L14 L15 L16 L17 L18 L19 L20 L21 L22 L23 L24 L25 L26 L27 L28 L29 L30 L31 L32 L33 L34 L35 L36 L37 L38 L39 L40 L41 L42 L43 L44 L45 L46 L47 L48 L49 L50 L51 L52 L53 L54 L55 L56: library part SK6812MINI_rev
SW1 SW2: library part MX_PCB_100H
SW3 SW4 SW5 SW6 SW7 SW8 SW9 SW10 SW11 SW12 SW13 SW14 SW15 SW16 SW17 SW18 SW19 SW20 SW21 SW22 SW23 SW24 SW25 SW26 SW27 SW28 SW29 SW30 SW31 SW32 SW33 SW34 SW35 SW36 SW37 SW38 SW39 SW40 SW41 SW42 SW43 SW44 SW45 SW46 SW47 SW48 SW49 SW50 SW51 SW52 SW53 SW54 SW55 SW56: library part CherryMX_Hotswap
SW57: library part "SMD 2Pin 3X4MM Tactile Tact Push Button"
U1: library part ArduinoProMicro

## Via types
v1: diameter 0.8, hole 0.4, F.Cu to B.Cu, tented both sides, 192 vias

## Nets (pads, with @x,y where several pads share a name; then routed paths per layer and width w, separated by ;. In a path a pad name is that pad's centre, name@x,y a point inside that pad or via, vN(x,y) a via of type N, cw(c..) or ccw(c..) an arc to the next point about the centre after c; other vN are vias at no path point)
col0: SW1.1 SW8.1 SW15.1 SW22.1 SW29.1 SW36.1 SW43.1 SW50.1 U1.7 | length 406
  F.Cu w0.25: v1(61,-70) 61.4,-70.4 63.175,-72.175 176.825,-72.175 v1(179,-70)
  B.Cu w0.25: SW1.1@2.54,5.08 3.5,4.12 3.5,-2 5,-3.5 5,-4.85 U1.7@7.77,-7.62 4.89,-10.5 -3.864,-10.5 -7,-13.636 -7,-15.17 SW8.1@-7,-16.42 SW15.1@-7,-35.42 SW22.1@-7,-54.42 -7,-69 -6,-70 v1(61,-70) ; v1(179,-70) 179.5,-69.5 233.5,-69.5 240,-63 SW29.1@240,-54.42 240,-50 240.5,-49.5 240.5,-45.5 240,-45 SW36.1@240,-35.42 SW43.1@240,-16.42 240,-12 240.5,-11.5 240.5,-7.5 240,-7 SW50.1@240,2.58
col1: SW2.1 SW9.1 SW16.1 SW23.1 SW30.1 SW37.1 SW44.1 SW51.1 U1.10 | length 365.6
  F.Cu w0.25: v1(61.5,-69) 61.9,-69.4 64.225,-71.725 175.775,-71.725 v1(178.5,-69)
  B.Cu w0.25: SW2.1@21.54,5.08 12.08,5.08 10,3 10,-2.23 U1.10@15.39,-7.62 12,-11.01 SW9.1@12,-16.42 SW16.1@12,-35.42 12,-45 12.5,-45.5 12.5,-49.5 12,-50 SW23.1@12,-54.42 12,-64.5 17,-69.5 60.434,-69.5 60.934,-69 v1(61.5,-69) ; v1(178.5,-69) 179.066,-69 215,-69 221,-63 SW30.1@221,-54.42 SW37.1@221,-35.42 SW44.1@221,-16.42 SW51.1@221,2.58
col2: SW3.1 SW10.1 SW17.1 SW24.1 SW31.1 SW38.1 SW45.1 SW52.1 U1.11 | length 316
  F.Cu w0.25: v1(31,-48.5) 31.5,-48 201.5,-48 v1(202,-48.5)
  B.Cu w0.25: U1.11@17.93,-7.62 17.93,-8.859 17.93,-13.93 22,-18 22,-20 25.5,-23.5 28.5,-23.5 31,-21 SW10.1@31,-16.42 ; SW24.1@31,-54.42 v1(31,-48.5) SW17.1@31,-35.42 SW10.1@31,-16.42 ; SW3.1@31,2.58 31,-7 31.5,-7.5 31.5,-11.5 31,-12 31,-13.5 SW10.1@31,-16.42 ; SW31.1@202,-54.42 v1(202,-48.5) SW38.1@202,-35.42 SW45.1@202,-16.42 SW52.1@202,2.58
col3: SW4.1 SW11.1 SW18.1 SW25.1 SW32.1 SW39.1 SW46.1 SW53.1 U1.14 | length 285.3
  F.Cu w0.25: v1(50,-49) 50.5,-48.5 182.5,-48.5 v1(183,-49)
  B.Cu w0.25: U1.14@17.93,7.62 19.31,9 48,9 50,7 SW4.1@50,2.58 SW11.1@50,-16.42 SW18.1@50,-35.42 v1(50,-49) SW25.1@50,-54.42 ; SW32.1@183,-54.42 v1(183,-49) SW39.1@183,-35.42 SW46.1@183,-16.42 SW53.1@183,2.58
col4: SW5.1 SW12.1 SW19.1 SW26.1 SW33.1 SW40.1 SW47.1 SW54.1 U1.15 | length 279.5
  F.Cu w0.25: v1(69,-49.5) 69.5,-49 163.5,-49 v1(164,-49.5)
  B.Cu w0.25: U1.15@15.39,7.62 17.27,9.5 66.5,9.5 69,7 SW5.1@69,2.58 SW12.1@69,-16.42 SW19.1@69,-35.42 v1(69,-49.5) SW26.1@69,-59.17 ; SW54.1@163.96,2.5 164,2.46 164,-6.5 164.5,-7 164.5,-12 164,-12.5 SW47.1@164,-16.42 SW40.1@164,-35.42 v1(164,-49.5) 164.5,-50 164.5,-54.5 164,-55 SW33.1@164,-59.17
col5: SW6.1 SW13.1 SW20.1 SW27.1 SW34.1 SW41.1 SW48.1 SW55.1 U1.16 | length 263.5
  F.Cu w0.25: v1(88,-50) 88.4,-49.6 88.55,-49.45 144.45,-49.45 v1(145,-50)
  B.Cu w0.25: U1.16@12.85,7.62 15.18,9.95 85.05,9.95 88,7 SW6.1@88,2.58 88,-7 88.5,-7.5 88.5,-11.5 88,-12 SW13.1@88,-16.42 SW20.1@88,-35.42 v1(88,-50) 88.5,-50.5 88.5,-54 88,-54.5 SW27.1@88,-59.17 ; SW34.1@145,-59.17 v1(145,-50) SW41.1@145,-35.42 SW48.1@145,-16.42 SW55.1@145,2.58
col6: SW7.1 SW14.1 SW21.1 SW28.1 SW35.1 SW42.1 SW49.1 SW56.1 U1.17 | length 252.5
  B.Cu w0.25: U1.17@10.31,7.62 13.19,10.5 104,10.5 107,7.5 ; SW28.1@107,-59.17 SW21.1@107,-35.42 SW14.1@107,-16.42 SW7.1@107,2.58 107,7.5 ; SW35.1@126,-59.17 SW42.1@126,-35.42 126.08,-35.34 SW49.1@126.08,-16.42 126,-16.34 SW56.1@126,2.58 126,3.83 126,7 124,9 108.5,9 107,7.5
GND: H1.1 H2.1 H3.1 H4.1 H5.1 H6.1 H7.1 H8.1 J1.3 L1.2 L2.2 L3.2 L4.2 L5.2 L6.2 L7.2 L8.2 L9.2 L10.2 L11.2 L12.2 L13.2 L14.2 L15.2 L16.2 L17.2 L18.2 L19.2 L20.2 L21.2 L22.2 L23.2 L24.2 L25.2 L26.2 L27.2 L28.2 L29.2 L30.2 L31.2 L32.2 L33.2 L34.2 L35.2 L36.2 L37.2 L38.2 L39.2 L40.2 L41.2 L42.2 L43.2 L44.2 L45.2 L46.2 L47.2 L48.2 L49.2 L50.2 L51.2 L52.2 L53.2 L54.2 L55.2 L56.2 SW57.2 U1.3 U1.4 U1.23 | length 1690.2
  F.Cu w0.25: v1(-1.5,-47) -1,-47.5 H8.1@9.5,-47.5 10,-47 v1(15,-47) ; H4.1@28.5,-9.5 29,-9 v1(34.5,-9) ; H1.1@85.5,-52 86,-51.5 v1(93,-51.5) ; H3.1@161.5,-9.5 162,-9 v1(167.5,-9) ; H6.1@237.5,-47.5 238,-47 v1(243.5,-47) ; H7.1@237.5,-9.5 238,-9 v1(243.5,-9)
  F.Cu w0.4: U1.23@-4.93,7.62 -1.55,11 255,11 257.5,8.5 257.5,-4 ; v1(-3.5,-28) v1(15.5,-28) v1(34.5,-28) v1(53.5,-28) v1(72.5,-28) v1(91.5,-28) v1(110.5,-28) v1(129.5,-28) v1(148.5,-28) v1(167.5,-28) v1(186.5,-28) v1(205.5,-28) v1(224.5,-28) v1(243.5,-28) 244.066,-28 252.5,-28 257,-23.5 ; v1(-2.5,-69) -1.5,-68 v1(-1.5,-66) v1(15.5,-66) v1(34.5,-66) v1(53.5,-66) 60,-66 65,-71 v1(72.5,-71) v1(91.5,-71) v1(110.5,-71) v1(129.5,-71) v1(148.5,-71) v1(167.5,-71) 175,-71 179.5,-66.5 v1(186.5,-66.5) v1(205.5,-66.5) v1(224.5,-66.5) v1(243.5,-66.5) 244.066,-66.5 252,-66.5 257.5,-61 257.5,-40.073 ; v1(-1.5,-47) -0.934,-47 ; v1(-1,4) 0,3 4,3 5.5,4.5 8.5,4.5 10,3 10,-0.5 v1(14.5,-5) ; v1(15,-47) v1(34.5,-47) v1(53.5,-47) v1(72.5,-47) v1(91.5,-47) v1(110.5,-47) v1(129.5,-47) v1(148.5,-47) v1(167.5,-47) v1(186.5,-47) v1(205.5,-47) v1(224.5,-47) 233.5,-47 235.9,-44.6 239.1,-44.6 241.5,-47 v1(243.5,-47) 244.066,-47 252.5,-47 257.5,-42 257.5,-40.073 ; v1(34.5,-9) v1(53.5,-9) v1(72.5,-9) 80.5,-9 83.4,-6.1 87.6,-6.1 90.5,-9 90.934,-9 v1(91.5,-9) ; H5.1@85.5,-9.5 86,-9 v1(91.5,-9) ; v1(93,-51.5) 94.5,-51.5 v1(95.5,-52.5) ; v1(130,-51.5) 131,-51.5 v1(133,-53.5) ; v1(255,-23.5) 257,-23.5 ; v1(91.5,-9) v1(110.5,-9) v1(129.5,-9) v1(148.5,-9) 157.5,-9 159.9,-6.6 162.964,-6.6 165.364,-9 166.934,-9 v1(167.5,-9) v1(186.5,-9) v1(205.5,-9) v1(224.5,-9) 233.5,-9 236,-6.5 239,-6.5 241.5,-9 242.934,-9 v1(243.5,-9) 252.5,-9 257.5,-4 ; 257,-23.5 257.5,-23 257.5,-21.073 ; 257.5,-40.073 257.5,-21.073 ; 257.5,-21.073 257.5,-4
  B.Cu w0.25: v1(148.5,-47) 153.5,-52 H2.1@161.5,-52
  B.Cu w0.4: SW57.2@-4.5,-68.5 -3,-68.5 v1(-2.5,-69) ; v1(-3.5,-28) -2.4,-26.9 L2.2@-2.4,-24.875 ; L4.2@-2.4,-62.875 -2.4,-65.1 v1(-1.5,-66) ; L3.2@-2.4,-43.875 -2.4,-46.1 -1.9,-46.6 v1(-1.5,-47) ; v1(-1,4) -1.31,4 U1.23@-4.93,7.62 -7,5.55 -7,-3 -4.625,-5.375 L1.2@-2.4,-5.375 -2.4,-7.61 U1.3@-2.39,-7.62 U1.4@0.15,-7.62 ; v1(14.5,-5) 15,-5.5 16.475,-5.5 L5.2@16.6,-5.375 ; v1(15,-47) 16.6,-45.4 L7.2@16.6,-43.875 ; v1(15.5,-66) 16.6,-64.9 L8.2@16.6,-62.875 ; v1(15.5,-28) 16.6,-26.9 L6.2@16.6,-24.875 ; v1(34.5,-66) 35.6,-64.9 L12.2@35.6,-62.875 35.6,-63.4 ; v1(34.5,-47) 35.6,-45.9 L11.2@35.6,-43.875 ; v1(34.5,-28) 35.6,-26.9 L10.2@35.6,-24.875 ; v1(34.5,-9) 35.6,-7.9 L9.2@35.6,-5.875 ; v1(53.5,-66) 54.6,-64.9 L16.2@54.6,-62.875 ; v1(53.5,-47) 54.6,-45.9 L15.2@54.6,-43.875 ; v1(53.5,-28) 54.6,-26.9 L14.2@54.6,-24.875 ; v1(53.5,-9) 54.6,-7.9 L13.2@54.6,-5.875 ; v1(72.5,-71) 73.6,-69.9 L20.2@73.6,-67.875 ; v1(72.5,-47) 73.6,-45.9 L19.2@73.6,-43.875 ; v1(72.5,-28) 73.6,-26.9 L18.2@73.6,-24.875 ; v1(72.5,-9) 73.6,-7.9 L17.2@73.6,-5.875 ; v1(91.5,-71) 92.6,-69.9 L24.2@92.6,-67.875 ; v1(91.5,-28) 92.6,-26.9 L22.2@92.6,-24.875 ; v1(91.5,-9) 92.6,-7.9 L21.2@92.6,-5.875 ; L23.2@92.6,-43.875 92.6,-45.9 v1(91.5,-47) 91.5,-50 v1(93,-51.5) ; v1(110.5,-71) 111.6,-69.9 L28.2@111.6,-67.875 ; v1(110.5,-47) 111.6,-45.9 L27.2@111.6,-43.875 ; v1(110.5,-28) 111.6,-26.9 L26.2@111.6,-24.875 ; v1(110.5,-9) 111.6,-7.9 L25.2@111.6,-5.875 ; v1(129.5,-71) 130.6,-69.9 L32.2@130.6,-67.875 ; v1(129.5,-28) 130.6,-26.9 L30.2@130.6,-24.875 ; v1(129.5,-9) 130.6,-7.9 L29.2@130.6,-5.875 ; v1(130,-51.5) 129.5,-51 v1(129.5,-47) 130.6,-45.9 L31.2@130.6,-43.875 ; v1(148.5,-71) 149.6,-69.9 L36.2@149.6,-67.875 ; v1(148.5,-47) 149.6,-45.9 L35.2@149.6,-43.875 ; v1(148.5,-28) 149.6,-26.9 L34.2@149.6,-24.875 ; v1(148.5,-9) 149.6,-7.9 L33.2@149.6,-5.875 ; v1(167.5,-71) 168.6,-69.9 L40.2@168.6,-67.875 ; v1(167.5,-47) 168.6,-45.9 L39.2@168.6,-43.875 ; v1(167.5,-28) 168.6,-26.9 L38.2@168.6,-24.875 ; v1(167.5,-9) 168.6,-7.9 L37.2@168.6,-5.875 ; v1(186.5,-66.5) 187.6,-65.4 L44.2@187.6,-62.875 ; v1(186.5,-47) 187.6,-45.9 L43.2@187.6,-43.875 ; v1(186.5,-28) 187.6,-26.9 L42.2@187.6,-24.875 ; v1(186.5,-9) 187.6,-7.9 L41.2@187.6,-5.875 ; v1(205.5,-66.5) 206.6,-65.4 L48.2@206.6,-62.875 ; v1(205.5,-47) 206.6,-45.9 L47.2@206.6,-43.875 ; v1(205.5,-28) 206.6,-26.9 L46.2@206.6,-24.875 ; v1(205.5,-9) 206.6,-7.9 L45.2@206.6,-5.875 ; v1(224.5,-66.5) 225.6,-65.4 L52.2@225.6,-62.875 ; v1(224.5,-47) 225.6,-45.9 L51.2@225.6,-43.875 ; v1(224.5,-28) 225.6,-26.9 L50.2@225.6,-24.875 ; v1(224.5,-9) 225.6,-7.9 L49.2@225.6,-5.875 ; v1(243.5,-66.5) 244.6,-65.4 L56.2@244.6,-62.875 ; v1(243.5,-47) 244.6,-45.9 L55.2@244.6,-43.875 ; v1(243.5,-28) 244.6,-26.9 L54.2@244.6,-24.875 ; v1(243.5,-9) 244.6,-7.9 L53.2@244.6,-5.875 ; J1.3@253,-23.5 v1(255,-23.5)
LED: L1.3 U1.2 | length 13.9
  B.Cu w0.25: U1.2@-4.93,-7.62 -4.054,-8.496 -3,-9.55 2.664,-9.55 3.891,-8.322 3.891,-6.566 2.7,-5.375 L1.3@2.4,-5.375
Net-(D1-Pad2): D1.2 SW1.2 | length 15.3
  F.Cu w0.25: SW1.2@-3.81,2.54 -3.745,2.475 2.025,2.475 3,1.5 3,-1.5 4.37,-2.87 6.62,-2.87 D1.2@7.47,-2.87
Net-(D2-Pad2): D2.2 SW2.2 | length 12.4
  F.Cu w0.25: SW2.2@15.19,2.54 27.06,2.54 D2.2@27.47,2.13
Net-(D3-Pad2): D3.2 SW3.2 | length 4.2
  B.Cu w0.25: SW3.2@43.7,5.12 43.85,5.12 46.47,2.5 D3.2@46.47,2.13